# Altium PCB bch-onemic_v0.1.PcbDoc
Units mm, origin at the board's own origin, x right, y up, seen from the top; angles counter-clockwise.
Board outline 29 x 29.99 mm, 4 copper layers (Top Layer, GND, VCC, Bot Layer), stack 1.564 mm thick; 12 components, 9 nets, 61 pads, 43 vias.
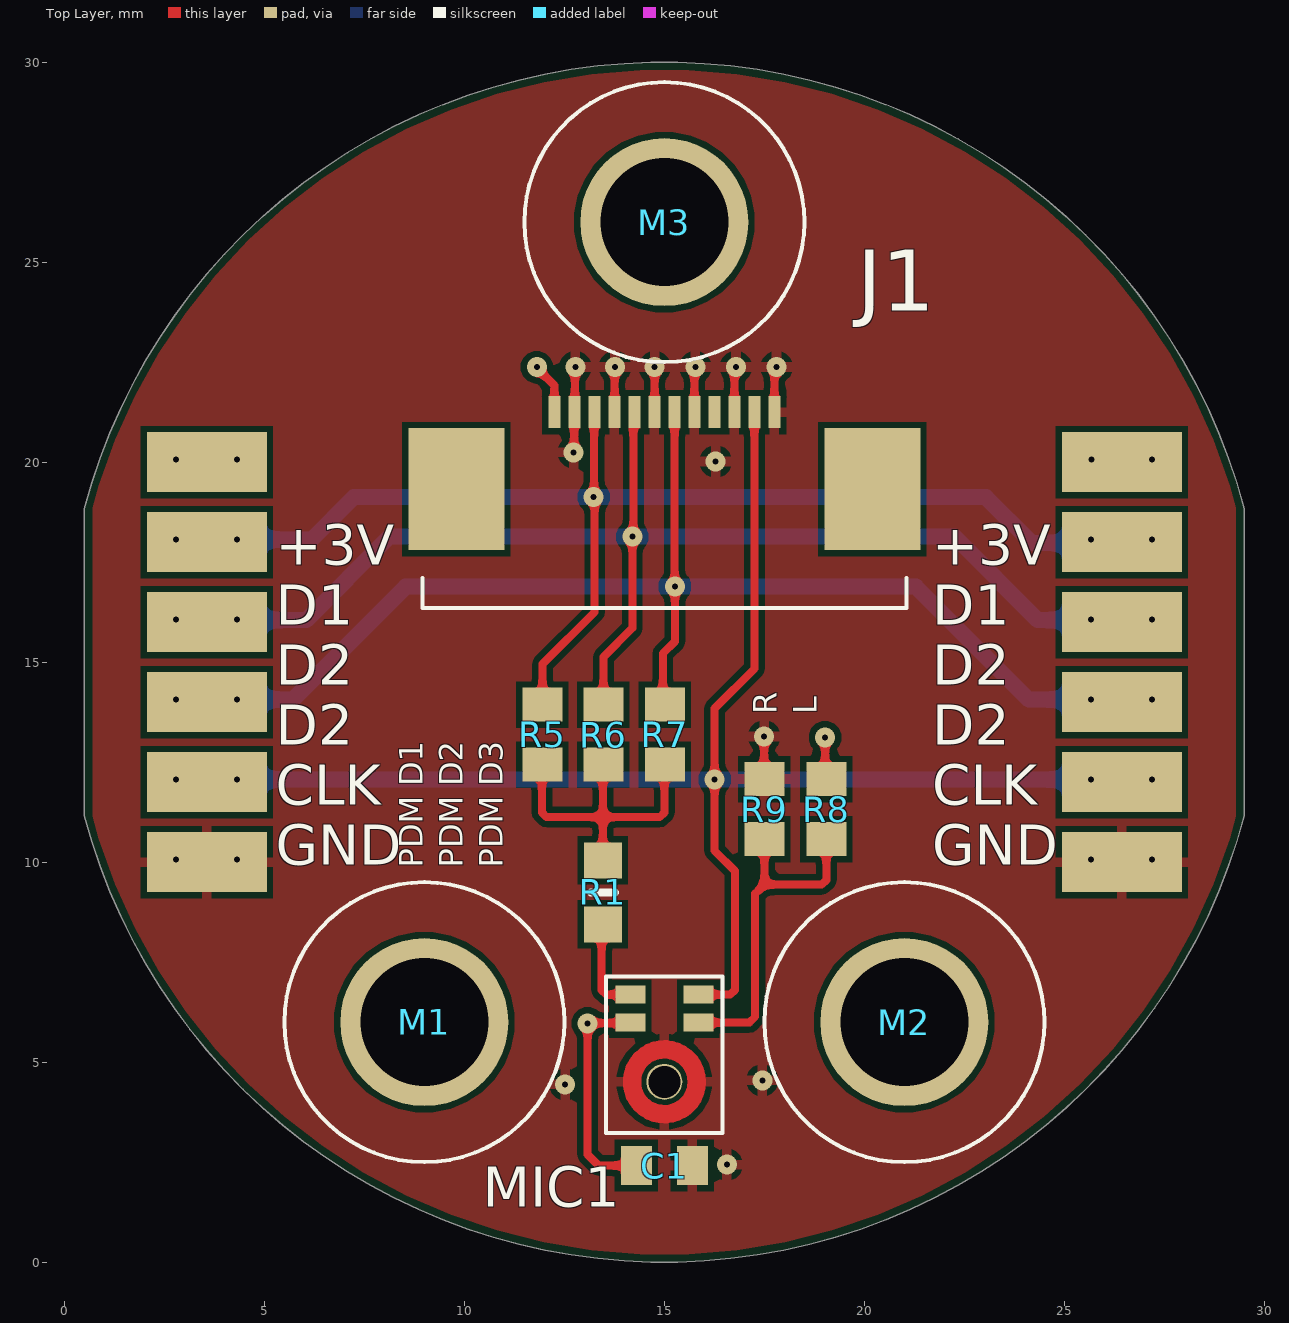
[diagram p0: Top Layer view]
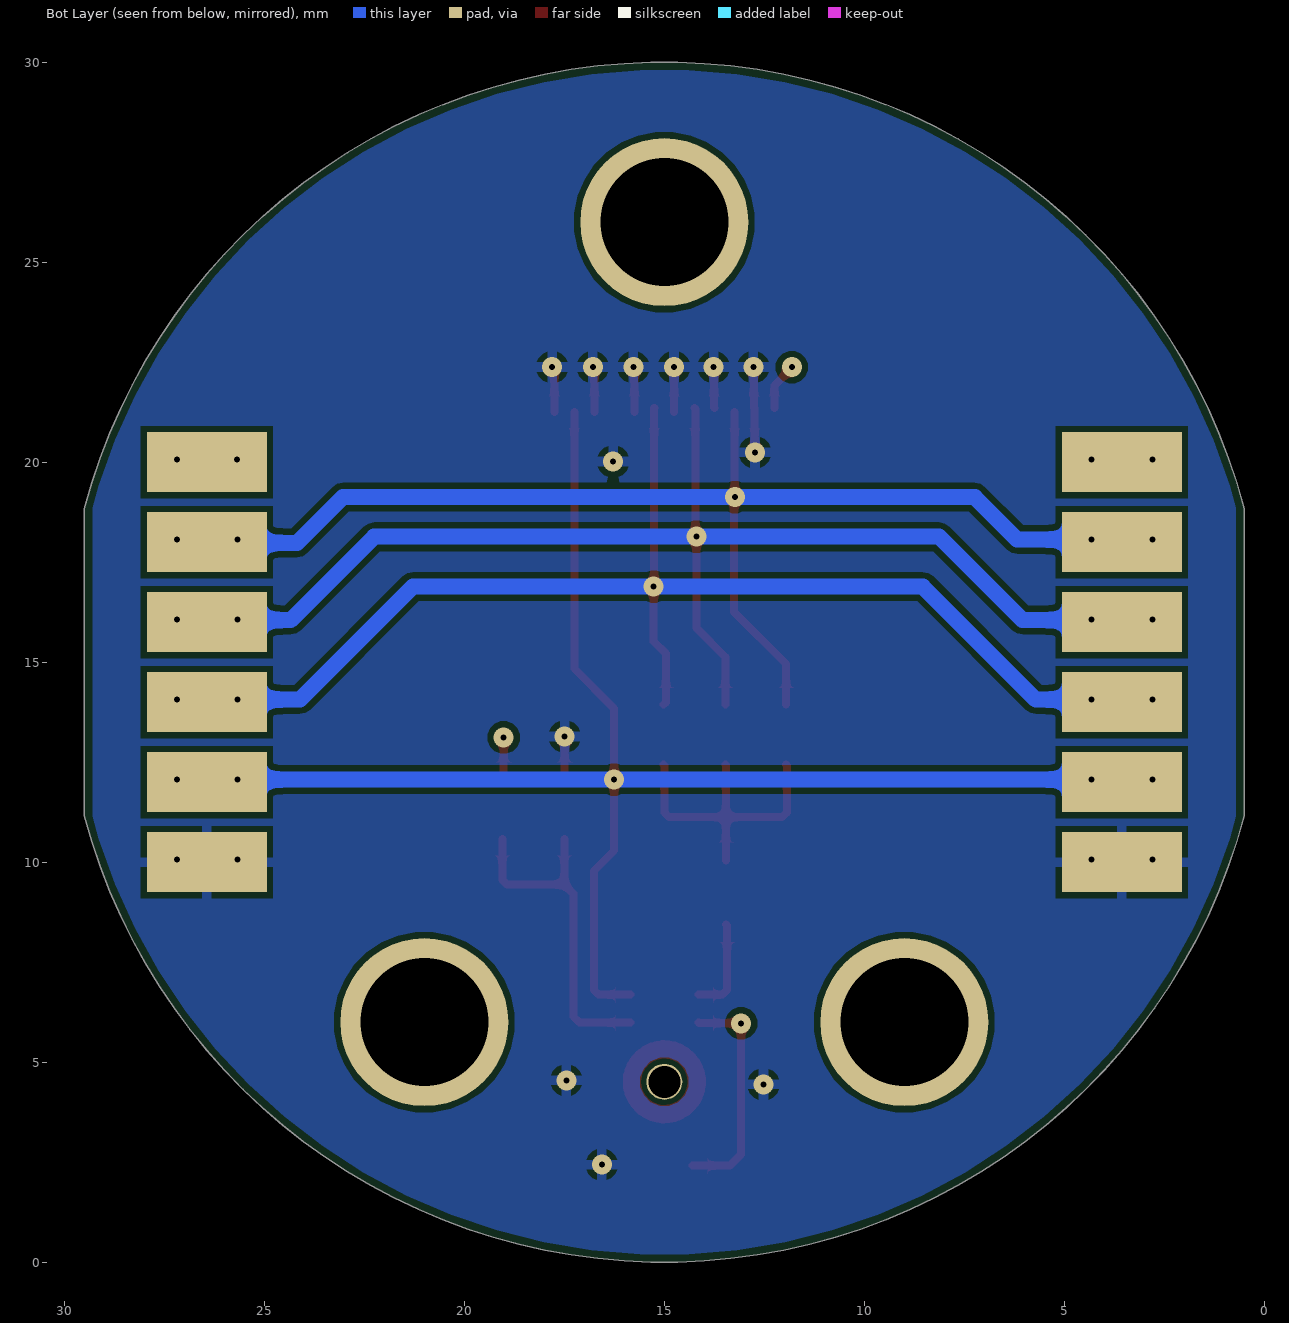
[diagram p1: Bot Layer view, seen from below]
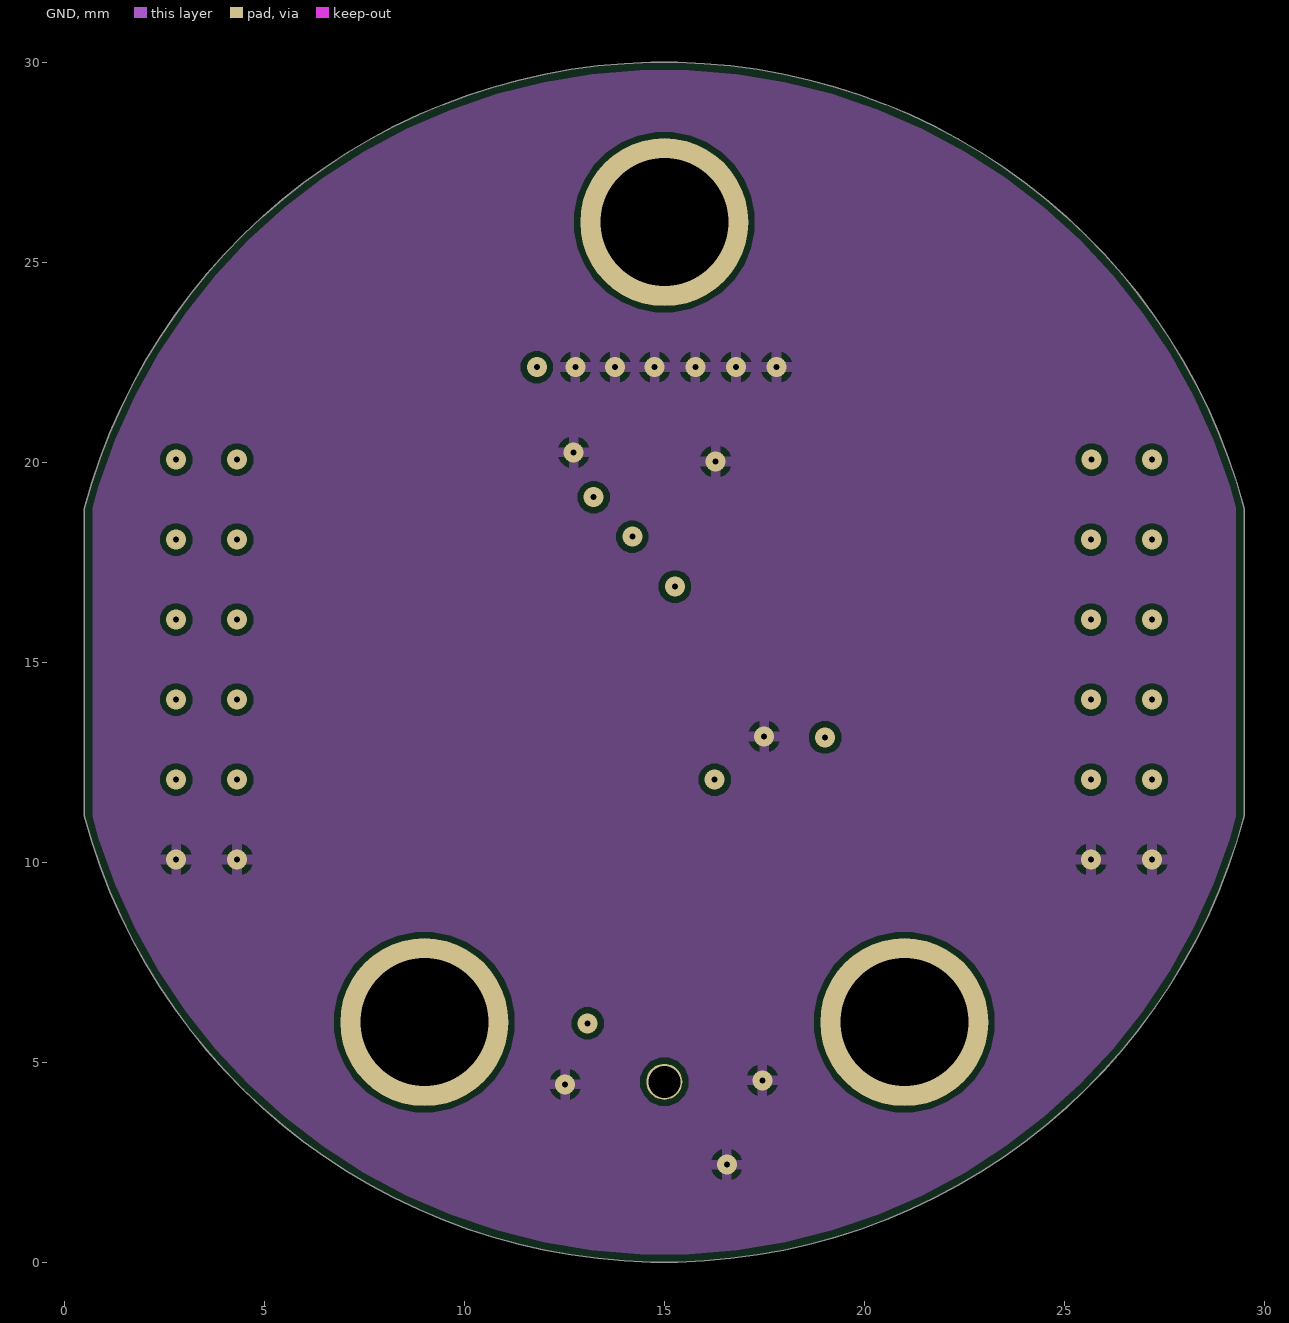
[diagram p2: GND]
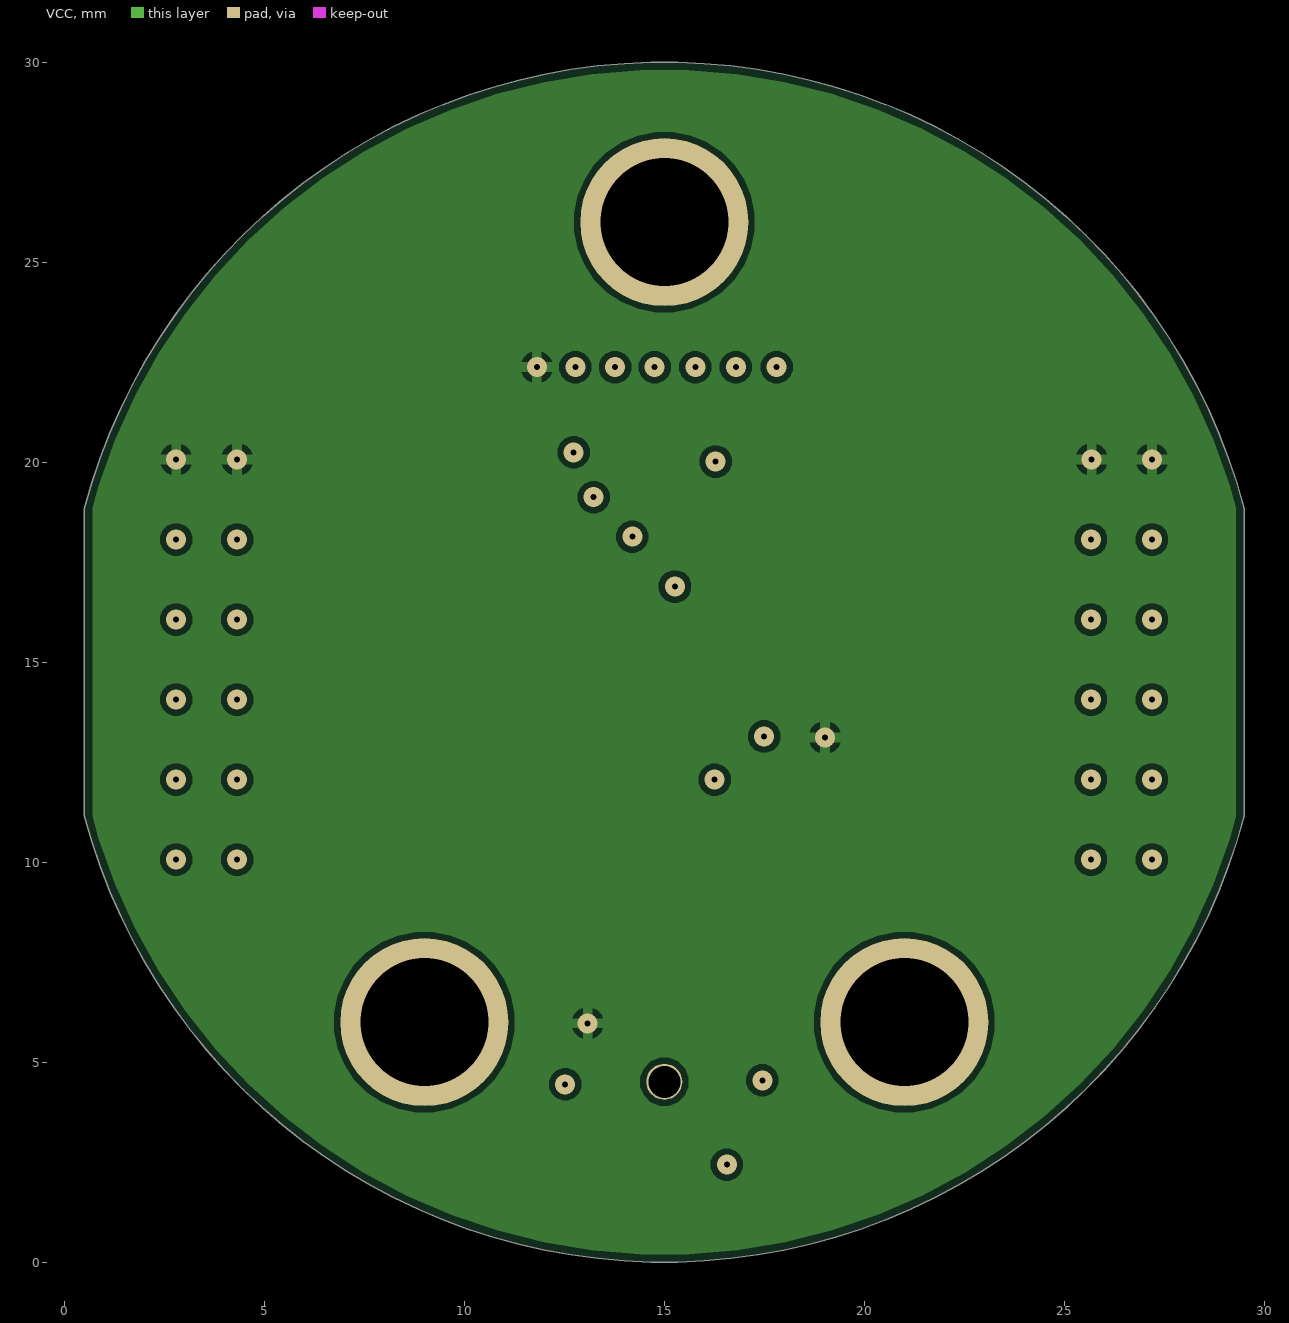
[diagram p3: VCC]
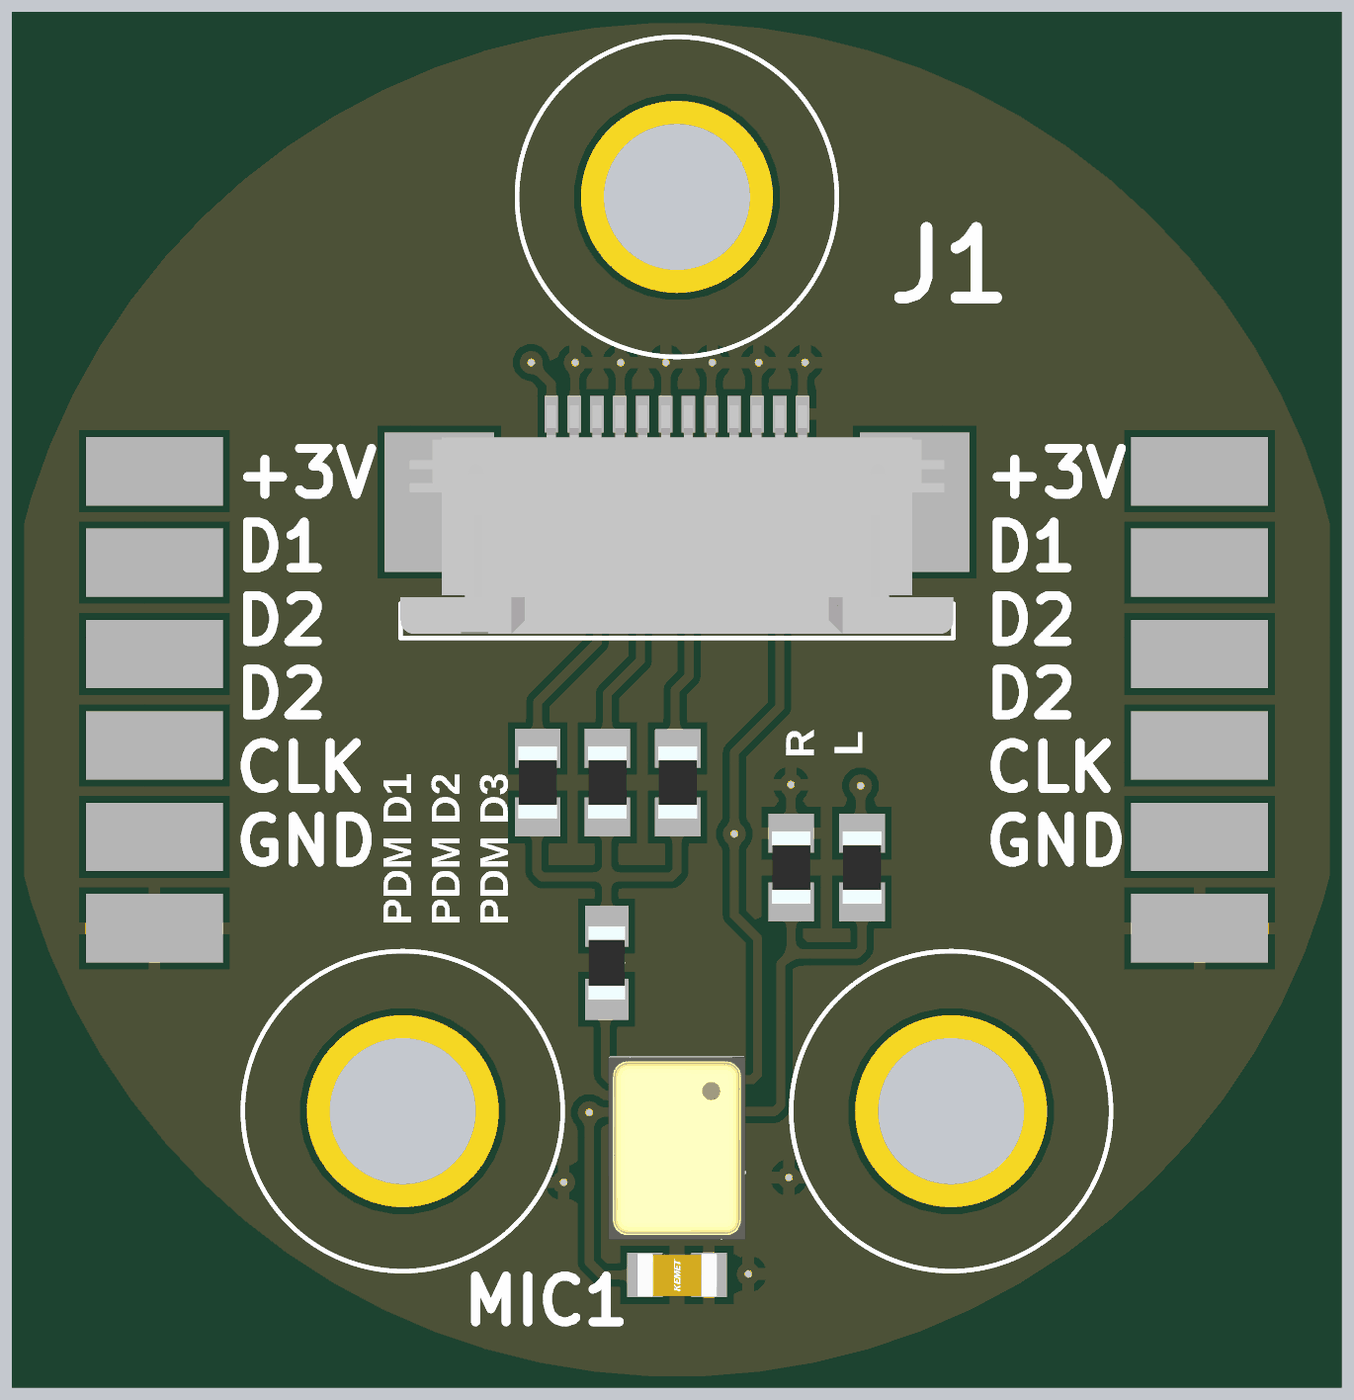
[diagram p4: 3D render of the assembled board from above, using the file's embedded part models]

## Layer stack, top to bottom
Top Solder: solder mask 0.0102, Solder Resist, Dk 3.5
Top Layer: signal copper 0.035
Dielectric 2: prepreg 0.0994, 3313, Dk 4.1
GND: signal copper 0.0152
Dielectric 1: dielectric 1.265, FR-4, Dk 4.6
VCC: signal copper 0.0152
Dielectric 3: prepreg 0.0994, 3313, Dk 4.1
Bot Layer: signal copper 0.035
Bottom Solder: solder mask 0.0102, Solder Resist, Dk 3.5

## Board outline
0.499,11.163 ccw(c15,15) 29.501,11.163 29.501,18.837 ccw(c15,15) 0.499,18.837

## Design rules (kind name [scope] priority, off if disabled: settings)
BoardOutlineClearance [All] p1: gap=0.2 ignorepadtopadclearanceinfootprint=FALSE
Clearance [All] p1: gap=0.15 ignorepadtopadclearanceinfootprint=FALSE except(0.1: Arc-Arc Arc-Track Track-Track SMDPad-SMDPad SMDPad-THPad)
DiffPairsRouting USB90 [InDifferentialPairClass('USB')] p1: maxlimit=0.127 minlimit=0.127 mostfreqgap=0.127 toplayer_minwidth=0.15 toplayer_maxwidth=0.15 toplayer_prefwidth=0.15 midlayer1_minwidth=0.11 midlayer1_maxwidth=0.11 midlayer1_prefwidth=0.11 midlayer2_minwidth=0.11 midlayer2_maxwidth=0.11 midlayer2_prefwidth=0.11 bottomlayer_minwidth=0.15 bottomlayer_maxwidth=0.15 bottomlayer_prefwidth=0.15 impedanceprofiledriven=TRUE impedanceprofileid={9A58D23A-041B-4CB7-92BB-26AE1DAE706B} impedanceprofilevalue=90.000000 maxuncoupledlength=12.7
DiffPairsRouting RF50 [All] p2: maxlimit=0.254 minlimit=0.254 mostfreqgap=0.254 toplayer_minwidth=0.381 toplayer_maxwidth=0.381 toplayer_prefwidth=0.381 midlayer1_minwidth=0.381 midlayer1_maxwidth=0.381 midlayer1_prefwidth=0.381 midlayer2_minwidth=0.381 midlayer2_maxwidth=0.381 midlayer2_prefwidth=0.381 bottomlayer_minwidth=0.381 bottomlayer_maxwidth=0.381 bottomlayer_prefwidth=0.381 maxuncoupledlength=12.7
HoleSize [All] p1: absolutevalues=TRUE maxlimit=6.3 minlimit=0.15 maxpercent=80.000 minpercent=20.000
MatchedLengths [InDifferentialPairClass('USB')] p1: tolerance=25.4 checknetsindiffpair=TRUE checkdiffpairvsdiffpair=FALSE checkxsignals=FALSE checkothers=FALSE usedelayunits=TRUE delaytolerance=15.000000 phasematching=TRUE phasedelaytolerance=5.000000 phasedistance=12.7
MinimumSolderMaskSliver [All] p1: minsoldermaskwidth=0.1
PlaneConnect [All] p1: planeconnectstyle=Relief reliefexpansion=0.5 reliefentries=4 reliefconductorwidth=0.254 reliefairgap=0.15
PolygonConnect [All] p1: connectstyle=Relief reliefconductorwidth=0.254 reliefentries=4 polygonreliefangle="90 Angle" airgapwidth=0.15
RoutingVias [All] p1: holewidth=0.711 width=1.27 viastyle="Through Hole" minholewidth=0.15 minwidth=0.25 maxholewidth=1 maxwidth=1.5
SilkToSilkClearance [All] p1: silktosilkclearance=0.15
SilkToSolderMaskClearance [IsPad] p1: minsilkscreentomaskgap=0.15 clearancetoexposedcopper=TRUE
SolderMaskExpansion [All] p1: expansion=0.005 istentingtop=FALSE
SupplyNets "Schematic Supply Nets_3" [InNet('+3V')] p1: voltage=0.000
SupplyNets "Schematic Supply Nets_1" [InNet('GND')] p2: voltage=0.000
Width Width_1 [InNetClass('50R_RF')] p1: maxlimit=0.175 minlimit=0.13 preferedwidth=0.175 toplayer_minwidth=0.175 midlayer1_maxwidth=0.13 midlayer1_prefwidth=0.13 midlayer2_maxwidth=0.13 midlayer2_prefwidth=0.13 bottomlayer_minwidth=0.175 impedanceprofiledriven=TRUE impedanceprofileid={F0846BDF-446F-457A-A208-F3BC433C4B43} impedanceprofilevalue=50.000000 minimp=50.000000 maximp=50.000000 favimp=50.000000
Width [All] p2: maxlimit=1 minlimit=0.15 preferedwidth=0.254 minimp=50.000000 maximp=50.000000 favimp=50.000000
24 further rules are at their usual default settings.

## Classes and differential pairs
net class R1_Nets: NetR1_2
net class M3_Nets: NetM3_1
net class M2_Nets: NetM2_1
net class M1_Nets: NetM1_1
net class C1_Nets: +3V GND
net class MIC1_Nets: +3V GND LR_SEL_1 NetR1_2 NetU4_2 NetU4_4 NetU4_7 NetU4_8 NetU4_9 NetU4_12 NetU4_13 NetU4_14 NetU4_15 NetU4_18 NetU4_19 NetU4_20 NetU4_21 NetU4_36 NetU4_37 NetU4_50 NetU4_53 NetU4_54 NetU4_55 NetU4_56 NetU4_57 NetU4_60 NetU4_63 NetU4_64 NetU4_65 NetU4_66 NetU4_67 NetU4_68 NetU4_77 NetU4_78 NetU4_79 NetU4_80 NetU4_81 NetU4_82 NetU4_85 NetU4_86 NetU4_87 NetU4_88 NetU4_89 NetU4_90 NetU4_91 NetU4_92 NetU4_93 NetU4_96 NetU4_97 NetU4_98 NetU4_99 NetU4_100 NetU4_101 NetU4_102 NetU4_110 NetU4_116 NetU4_118 NetU4_119 NetU4_122 NetU4_123 NetU4_124 NetU4_125 NetU4_126 NetU4_127 NetU4_129 NetU4_133 NetU4_139 NetU4_140 NetU4_141 PDM_CLK_1
net class R9_Nets: GND LR_SEL_1
net class R8_Nets: +3V LR_SEL_1
net class R7_Nets: NetR1_2 PDM_D3_1
net class R6_Nets: NetR1_2 PDM_D2_1
net class R5_Nets: NetR1_2 PDM_D1_1
net class J1_Nets: +3V GND PDM_CLK_1 PDM_D1_1 PDM_D2_1 PDM_D3_1

## Components (designator, comment, footprint, x,y, rotation, side; value= is the part's Value field where it differs from the comment)
C1 "0.1u" CAPC1608X95N 15,2.416 r0 top
J1 "52745-1297" 527451297 15,18.5 r0 top locked
M1 "MTH-3MM" MountingHole_3.0mm_NPTH 9,6 r0 top locked
M2 "MTH-3MM" MountingHole_3.0mm_NPTH 21,6 r180 top locked
M3 "MTH-3MM" MountingHole_3.0mm_NPTH 15,26 r0 top locked
MIC1 "PDM MIC" LLGA-5-4X3 15,5.189 r180 top
R1 "33R" RESC1608X55N 13.462,9.246 r90 top
R5 "0R" RESC1608X50N 11.954,13.188 r90 top
R6 "0R" RESC1608X50N 13.478,13.188 r90 top
R7 "0R" RESC1608X50N 15.016,13.186 r90 top
R8 "1k" RESC1608X50N 19.05,11.328 r90 top
R9 "1k" RESC1608X50N 17.501,11.328 r90 top

## Footprints (in the part's own frame and the unit in brackets; to place one, negate y for a bottom-side part, rotate by r counter-clockwise, add the part's x,y. Pads: shape width x height; smd on the part's side, far side on the other; paste and mask are expansions set on the pad)
527451297 [mm]
  rect 0.3x0.8 smd: 1(-2.75,2.75) 2(-2.25,2.75) 3(-1.75,2.75) 4(-1.25,2.75) 5(-0.75,2.75) 6(-0.25,2.75) 7(0.25,2.75) 8(0.75,2.75) 9(1.25,2.75) 10(1.75,2.75) 11(2.25,2.75) 12(2.75,2.75)
  rect 2.4x3.05 smd: MP1(-5.2,0.825) MP2(5.2,0.825)
  silkscreen extent -6.05,-2.15 6.05,-1.4, body extent -6.05,-2.06 6.05,2.94, height 2
CAPC1608X95N [mm]
  rect 0.78x0.98 smd: 1(-0.7,0) 2(0.7,0)
  body extent -0.87,-0.48 0.88,0.47, height 0.87
LLGA-5-4X3 [mm]
  rect 0.75x0.45 smd: 1(0.85,-1.5) 2(0.85,-0.8) 3(-0.85,-1.5) 4(-0.85,-0.8)
  round 0 smd: 5(0,0.68)
  round 0.9 hole 0.8: 6(0,0.68)
  silkscreen extent -1.45,-1.95 1.46,1.96, body extent -1.5,-2 1.5,2, height 1.3
MountingHole_3.0mm_NPTH [mm]
  round 4.2 hole 3.2 unplated: 1(0,0)
  silkscreen extent -3.5,-3.5 3.5,3.5
RESC1608X50N [mm]
  rect 0.85x1 smd: 1(-0.75,0) 2(0.75,0)
  body extent -0.79,-0.43 0.79,0.43, height 0.5
RESC1608X55N [mm]
  rect 0.9x0.95 smd: 1(-0.8,0) 2(0.8,0)
  silkscreen extent 0,-0.3 0,0.3, body extent -0.8,-0.4 0.8,0.4, height 0.55

## Part data
C1: library part ECK+100n16V, "16V 0.1uF XR7 0603 10%", Arrow Part Number=C0603C104K4RAC-TU, Manufacturer_Name=KEMET, Mouser Part Number=80-C0603C104K4RAC, Arrow Price/Stock=https://www.arrow.com/en/products/c0603c104k4ractu/kemet-corporation, Datasheet Link=https://connect.kemet.com:7667/gateway/IntelliData-ComponentDocumentation/1.0/download/specsheet/C0603C104K4RACTU, Height=0.95mm, Manufacturer_Part_Number=C0603C104K4RAC-TU
J1: library part EJ+52745-1297, "FFC & FPC Connectors RA SMT ZIF TOP 12P GOLD, Pitch: 0.5 mm, Mounting Angle / Contact Location: Right Angle / Top Contact, Current Rating: 500 mA, Voltage Rating: 50 V", Manufacturer_Name=Molex, Mouser Part Number=538-52745-1297, Datasheet Link=https://www.molex.com/pdm_docs/sd/527451297_sd.pdf, Height=2mm, Manufacturer_Part_Number=52745-1297, Mouser Price/Stock=https://www.mouser.co.uk/ProductDetail/Molex/52745-1297?qs=nDwhpid8gJaCgIkitRUygg%3D%3D
M1 M2 M3: library part EMECH-MTH-3MM
MIC1: library part EX+IM67D130AXTSA2, "MEMS Microphones MIC DBP DIGITAL"
R1: library part ER+33R, "Resistor 1% 0.1W", Manufacturer_Name=ROYALOHM, Manufacturer_Part_Number=0603WAF330JT5E, Mouser Part Number=303-0603WAF330JT5E, Datasheet Link=https://datasheet.lcsc.com/lcsc/2206010116_UNI-ROYAL-Uniroyal-Elec-0603WAF330JT5E_C23140.pdf, Height=0.55mm, Mouser Price/Stock=https://www.mouser.co.uk/ProductDetail/Royalohm/0603WAF330JT5E?qs=e8oIoAS2J1RitKiKgULsBA%3D%3D
R5 R6 R7: library part ER+0R, "2A", Arrow Part Number=RCA06030000ZSEA, Manufacturer_Name=Vishay, Mouser Part Number=71-RCA06030000ZSEA, Arrow Price/Stock=https://www.arrow.com/en/products/rca06030000zsea/vishay?region=nac, Datasheet Link=https://componentsearchengine.com/Datasheets/2/RCA06030000ZSEA.pdf, Height=0.5mm, Manufacturer_Part_Number=RCA06030000ZSEA, Mouser Price/Stock=https://www.mouser.co.uk/ProductDetail/Vishay-Draloric/RCA06030000ZSEA?qs=4%252Ber4tcBTOg9nmK7yWNpHw%3D%3D
R8 R9: library part ER+1K, "Resistor 1%, 0.1W", Arrow Part Number=CRCW06031K00FKEA, Manufacturer_Name=Vishay, Mouser Part Number=71-CRCW0603-1.0K-E3, Arrow Price/Stock=https://www.arrow.com/en/products/crcw06031k00fkea/vishay?region=europe, Datasheet Link=http://www.vishay.com/docs/20035/dcrcwe3.pdf, Height=0.5mm, Manufacturer_Part_Number=CRCW06031K00FKEA, Mouser Price/Stock=https://www.mouser.co.uk/ProductDetail/Vishay-Dale/CRCW06031K00FKEA?qs=CToX950LohJasujQx7GY3g%3D%3D

## Free pads (board coordinates)
  rect 3x1.5 smd: 10(3.564,10) 10(3.564,12) 10(3.564,14) 10(3.564,16) 10(3.564,18) 10(3.564,20) 10(26.436,10) 10(26.436,12) 10(26.436,14) 10(26.436,16) 10(26.436,18) 10(26.436,20)
  rect 3x1.5 smd far side: 10(3.564,10) 10(3.564,12) 10(3.564,14) 10(3.564,16) 10(3.564,18) 10(3.564,20) 10(26.436,10) 10(26.436,12) 10(26.436,14) 10(26.436,16) 10(26.436,18) 10(26.436,20)

## Via types
v1: diameter 0.5, hole 0.15, Top Layer to Bot Layer, 43 vias

## Nets (pads, with @x,y where several pads share a name; then routed paths per layer and width w, separated by ;. In a path a pad name is that pad's centre, name@x,y a point inside that pad or via, vN(x,y) a via of type N, cw(c..) or ccw(c..) an arc to the next point about the centre after c; other vN are vias at no path point)
+3V: C1.1 J1.1 MIC1.2 pad.10@3.564,20 pad.10@26.436,20 R8.2 | length 7.9
  Top Layer w0.2: v1@11.811,22.352 12.25,21.913 J1.1@12.25,21.356 ; MIC1.2 14.14,5.979 13.091,5.979 v1(13.081,5.969) 13.081,2.692 13.357,2.416 C1.1 ; v1(19.018,13.117) 19.018,12.111 R8.2
  other v1: 2.794,20.066 4.318,20.066 25.682,20.066 27.19,20.066 11.811,22.377
GND: C1.2 J1.2 J1.4 J1.6 J1.8 J1.10 J1.12 MIC1.5 pad.10@3.564,10 pad.10@26.436,10 R9.2 | length 13.8
  Top Layer w0.2: v1(12.733,20.244) 12.742,20.252 12.742,21.347 12.763,21.369 12.763,22.288 v1@12.776,22.301 ; J1.4@13.75,21.356 13.758,21.364 13.758,22.318 v1@13.767,22.327 ; J1.6@14.757,21.257 v1(14.757,22.377) ; J1.8 15.75,22.354 v1(15.773,22.377) ; J1.10 16.75,22.338 v1(16.789,22.377) ; v1(17.494,13.142) 17.494,12.085 R9.2 ; J1.12 17.75,22.322 v1(17.805,22.377)
  Top Layer w0.46: 15.81,4.509 ccw(c15,4.509) 15.81,4.509
  other v1: 16.561,2.438 12.522,4.445 17.45,4.547 2.794,10.066 4.318,10.066 25.666,10.066 27.19,10.066 16.281,20.015 12.776,22.377 13.767,22.377
LR_SEL_1: MIC1.4 R8.1 R9.1 | length 8.6
  Top Layer w0.2: MIC1.4 17.125,5.989 17.272,6.136 17.272,9.211 17.501,9.44 ; R9.1 17.501,9.44 ; R8.1 19.05,9.557 18.933,9.44 17.501,9.44
NetMIC1_1: MIC1.1 R1.1 | length 2.4
  Top Layer w0.2: R1.1 13.432,8.415 13.432,6.806 13.549,6.689 MIC1.1
NetR1_2: R1.2 R5.1 R6.1 R7.1 | length 8
  Top Layer w0.2: R5.1 11.938,12.422 11.938,11.242 12.055,11.125 13.462,11.125 ; R1.2 13.462,11.125 ; R6.1 13.462,12.422 13.462,11.125 ; R7.1 15,12.42 15,11.242 14.883,11.125 13.462,11.125
PDM_CLK_1: J1.11 MIC1.3 pad.10@3.564,12 pad.10@26.436,12 | length 37.4
  Top Layer w0.2: MIC1.3 16.647,6.689 16.764,6.806 16.764,9.779 16.256,10.287 v1(16.256,12.065) 16.256,13.843 17.25,14.837 J1.11
  Bot Layer w0.4: v1(4.318,12.066) v1(4.318,12.066) v1(16.256,12.065) 25.665,12.065 v1(25.666,12.066)
  other v1: 2.794,12.066 27.19,12.066
PDM_D1_1: J1.3 pad.10@3.564,18 pad.10@26.436,18 R5.2 | length 33.3
  Top Layer w0.2: R5.2 11.954,14.951 13.259,16.256 13.259,19.101 v1(13.233,19.126) 13.242,19.135 13.242,21.242 J1.3
  Bot Layer w0.4: v1(2.794,18.066) 2.826,18.034 4.318,18.034 pad.10@4.343,18.009 ; v1(4.318,18.066) 6.179,18.066 7.239,19.126 v1(13.233,19.126) 23.038,19.126 24.181,17.983 25.583,17.983 v1(25.666,18.066) ; pad.10@25.655,18.034 27.158,18.034 v1(27.19,18.066)
PDM_D2_1: J1.5 pad.10@3.564,16 pad.10@26.436,16 R6.2 | length 30.8
  Top Layer w0.2: R6.2 13.478,15.132 14.199,15.853 v1(14.199,18.136) 14.224,18.161 14.224,21.33 J1.5@14.25,21.356
  Bot Layer w0.4: v1(4.318,16.066) 4.331,16.053 6.045,16.053 8.128,18.136 v1(14.199,18.136) 22.258,18.136 24.34,16.053 25.653,16.053 v1(25.666,16.066)
  other v1: 2.794,16.066 27.19,16.066
PDM_D3_1: J1.7 pad.10@3.564,14 pad.10@26.436,14 R7.2 | length 31.3
  Top Layer w0.2: R7.2 14.961,13.991 14.961,15.215 15.265,15.519 v1(15.265,16.891) 15.258,16.899 15.258,21.348 J1.7@15.25,21.356
  Bot Layer w0.4: pad.10@4.38,14.066 v1(4.318,14.066) 5.709,14.066 8.534,16.891 v1(15.265,16.891) 21.285,16.891 24.11,14.066 v1(25.666,14.066)
  other v1: 2.794,14.066 27.19,14.066
pads on no net: J1.9 J1.MP1 J1.MP2 M1.1 M2.1 M3.1 MIC1.6

## Polygon pours and split planes (outlines as drawn)
GND on Bot Layer "NONET_L-01_P-001" (solid, pour order 3): 0.246,0 30,0 30,30 -0.246,30
GND on GND "NONET_L-01_P-001" (solid, pour order 2): 0.246,0 30,0 30,30 -0.246,30
GND on Top Layer "NONET_L-01_P-001" (solid, pour order 1): 0.246,0 30,0 30,30 -0.246,30
+3V on VCC "NONET_L-01_P-001" (solid, pour order 0): 0.246,0 30,0 30,30 -0.246,30

## Silkscreen, mask and mechanical layers (free items; w line width, h text height)
Top Overlay:
  text "R / L" at 19.009,13.696 h1 r90
  text "+3V / D1 / D2 / D2 / CLK / GND" at 5.283,9.931 h1
  text "+3V / D1 / D2 / D2 / CLK / GND" at 21.692,9.931 h1
  text "PDM D1 / PDM D2 / PDM D3" at 11.16,9.867 h1 r90
Panel outline:
  the board outline again, w0.1
Route Tool Path:
  lines w1: 0.028,10.988 ccw(c15,15) 29.972,10.988 ; 0.028,10.988 cw(c0.511,11.118) 0.011,11.118 ccw(c0.511,11.118) 0.028,10.988 ; 0.028,19.012 cw(c15,15) 29.972,19.012 ; 0.028,19.012 ccw(c0.511,18.882) 0.011,18.882 cw(c0.511,18.882) 0.028,19.012 ; 29.972,10.988 ccw(c29.489,11.118) 29.989,11.118 cw(c29.489,11.118) 29.972,10.988 ; 29.972,19.012 cw(c29.489,18.882) 29.989,18.882 ccw(c29.489,18.882) 29.972,19.012